# Altium PCB RigadoBreakout.PcbDoc
Units mil, origin at the board's own origin, x right, y up, seen from the top; angles counter-clockwise.
Board outline 900 x 1230 mil, 2 copper layers (Top Layer, Bottom Layer); 13 components, 27 nets, 98 pads, 12 vias.
Unrouted connection lines stored in the file: 14.
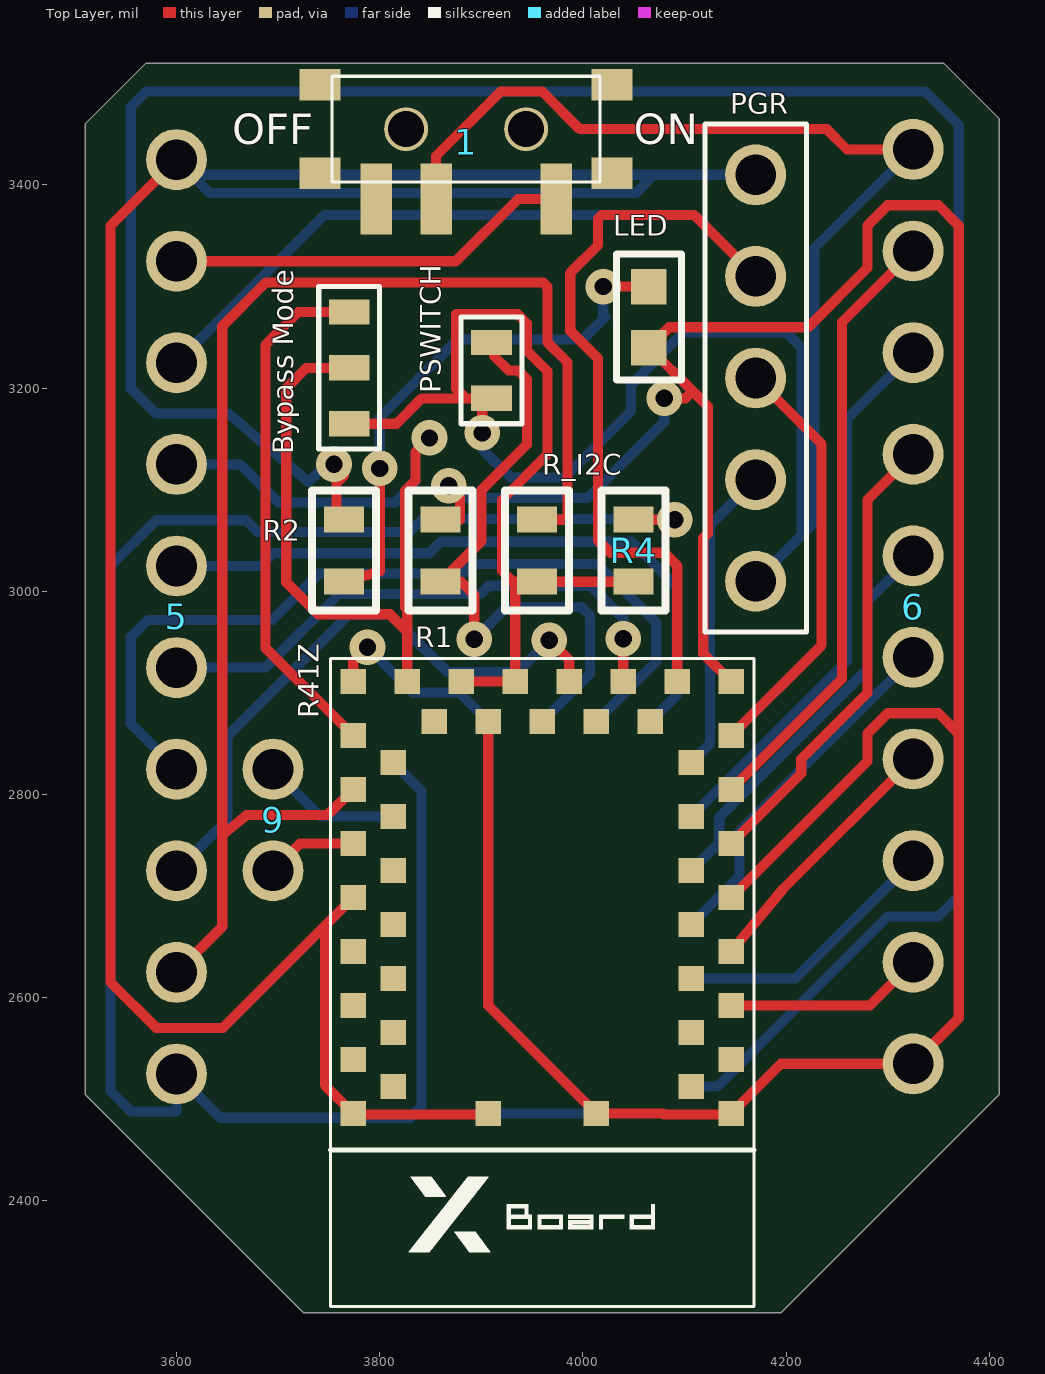
[diagram p0: Top Layer view]
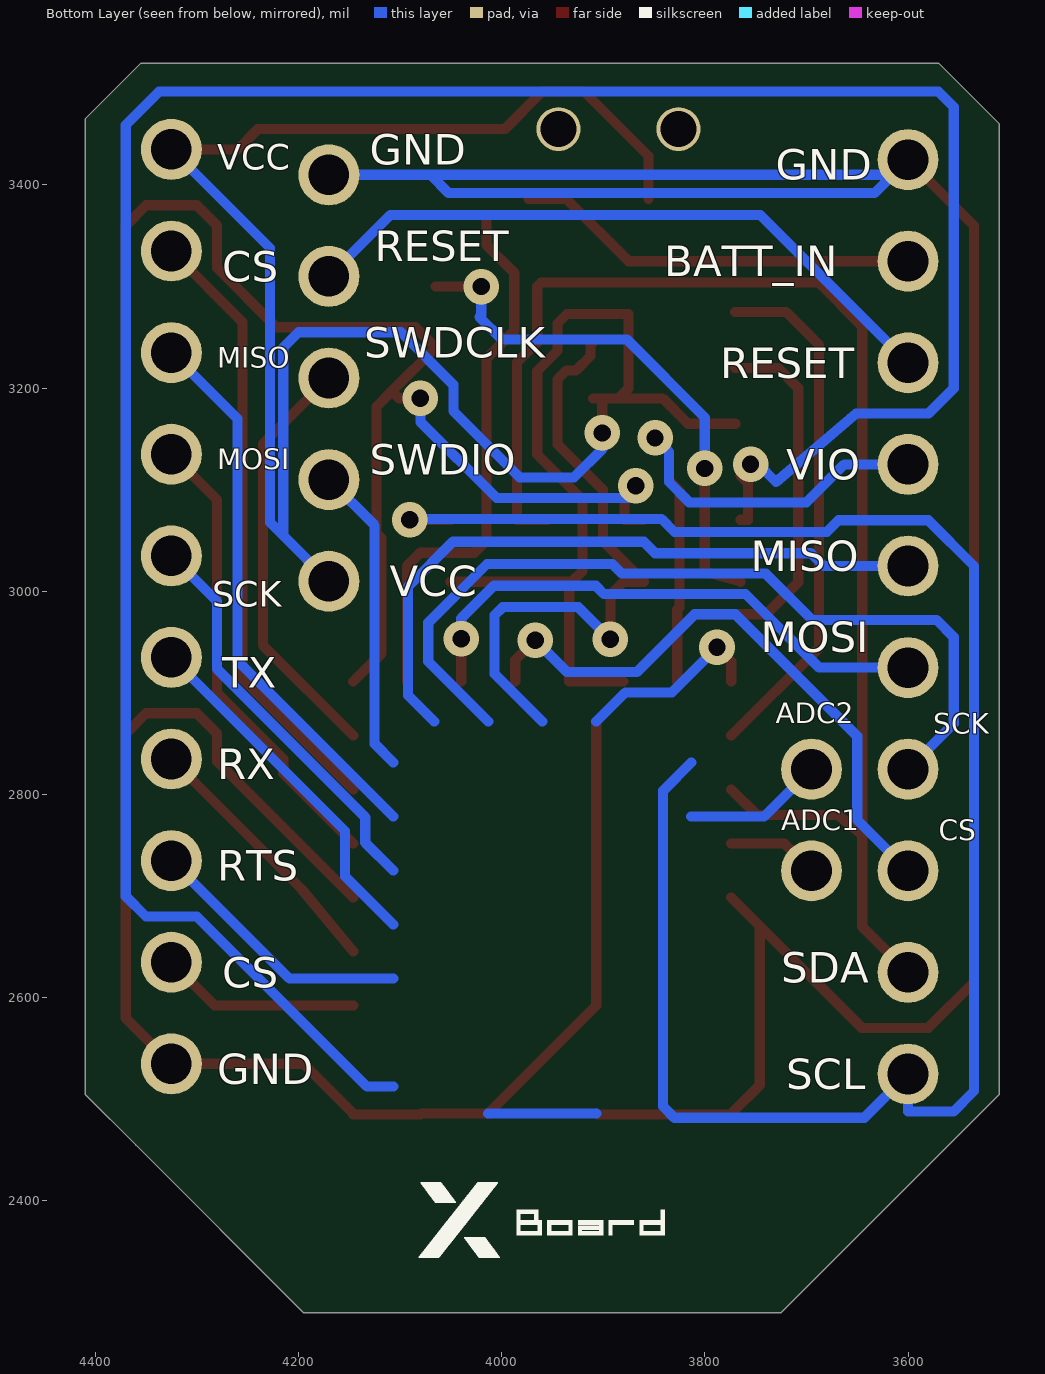
[diagram p1: Bottom Layer view, seen from below]

## Layer stack, top to bottom
Top Solder: solder mask 0.4, Solder Resist, Dk 3.5
Top Layer: signal copper 1.4
Dielectric 1: dielectric 12.6, FR-4, Dk 4.8
Bottom Layer: signal copper 1.4
Bottom Solder: solder mask 0.4, Solder Resist, Dk 3.5

## Board outline
3510,2505 3575,2440 3725,2290 4195,2290 4360,2455 4410,2505 4410,3465 4355,3520 3570,3520 3510,3460

## Design rules (kind name [scope] priority, off if disabled: settings)
Clearance [All] p1: gap=10
PolygonConnect [All] p1: connectstyle=Relief reliefconductorwidth=10 reliefentries=4 polygonreliefangle="90 Angle" airgapwidth=10
RoomDefinition RigadoBreakout [InComponentClass('RigadoBreakout')] p1: confinementstyle=ConfineIn formatcopy=TRUE lockcomponents=FALSE outline 0,0 2000,0 2000,1000 0,1000
RoutingVias [All] p1: holewidth=17 width=35 viastyle="Through Hole" minholewidth=15 minwidth=30 maxholewidth=20 maxwidth=40
SolderMaskExpansion [All] p1: expansion=4
UnpouredPolygon [All] p1: allowunpoured=FALSE
Width [All] p1: maxlimit=10 minlimit=10 preferedwidth=10
29 further rules are at their usual default settings.

## Classes and differential pairs
component class RigadoBreakout: 1 5 6 9 "Bypass Mode" PGR R1 R2 R4 R_I2C

## Components (designator, comment, footprint, x,y, rotation, side; value= is the part's Value field where it differs from the comment)
1 "Power Switch" "SMT_SWITCH - duplicate" 3885,3455 r180 top
5 "Pin Breakout" 10Pin_Breakout 3600,3425 r180 top
6 "Pin Breakout" 10Pin_Breakout 4325,3435 r180 top
9 "ADC Breakout" "ADC Breakout" 3695,2725 r0 top
"Bypass Mode" "Jumper Switch" JumpSwitch 3770,3275 r270 top
LED "LED" SMD0603 4065,3270 r270 top (schematic designator 2)
PGR "Programmer" Programmer 4170,3010 r0 top (schematic designator A)
PSWITCH "Jumper Switch2" JumpSwitch2 3910,3190 r90 top (schematic designator 8)
R1 "0603 Res" "0603/1608 SMD Resistor" 3860,3040 r90 top
R2 "0603 Res" "0603/1608 SMD Resistor" 3765,3040 r90 top
R4 "0603 Res" "0603/1608 SMD Resistor" 4050,3040 r90 top
R41Z "Rigado R41Z" RigadoR41Z 3960,2615 r90 top (schematic designator *)
R_I2C "0603 Res" "0603/1608 SMD Resistor" 3955,3040 r90 top (schematic designator R3)

## Footprints (in the part's own frame and the unit in brackets; to place one, negate y for a bottom-side part, rotate by r counter-clockwise, add the part's x,y. Pads: shape width x height; smd on the part's side, far side on the other; paste and mask are expansions set on the pad)
10Pin_Breakout [mil]
  round 60 hole 40: 1(0,0) 1(0,0) 2(0,100) 3(0,200) 4(0,300) 5(0,400) 6(0,500) 7(0,600) 8(0,700) 9(0,800) 10(0,900)
"0603/1608 SMD Resistor" [mm]
  rect 0.65x1 smd: 1(0.775,0) 2(-0.775,0)
  silkscreen extent -1.5,-0.8 1.5,0.8, body extent -0.8,-0.5 0.8,0.5, height 1.2
"ADC Breakout" [mil]
  round 60 hole 40: 1(0,0) 2(0,100)
JumpSwitch [mil]
  rect 25x40 smd: 1(0,0) 2(55,0) 3(110,0)
  silkscreen extent -25,-30 135,30
JumpSwitch2 [mil]
  rect 25x40 smd: 1(0,0) 2(55,0)
  silkscreen extent -25,-30 80,30
Programmer [mil]
  round 60 hole 40: 1(0,0) 2(0,100) 3(0,200) 4(0,300) 5(0,400)
  silkscreen extent -50,-50 50,450
RigadoR41Z [mm]
  rect 0.635x0.635 smd: 1(-3.275,-4.725) 3(-1.925,-4.725) 5(-0.575,-4.725) 7(0.775,-4.725) 9(2.125,-4.725) 11(3.475,-4.725) 13(4.825,-4.725) 15(6.175,-4.725) 16(7.525,-4.725) 17(7.525,-3.375) 19(7.525,-2.025) 21(7.525,-0.675) 23(7.525,0.675) 25(7.525,2.025) 27(7.525,3.375) 28(7.525,4.725) 29(6.175,4.725) 31(4.825,4.725) 33(3.475,4.725) 35(2.125,4.725) 37(0.775,4.725) 39(-0.575,4.725) 41(-1.925,4.725) 43(-3.275,4.725)
  rect 0.635x0.635 smd paste+0: 2(-2.6,-3.725) 4(-1.25,-3.725) 6(0.1,-3.725) 8(1.45,-3.725) 10(2.8,-3.725) 12(4.15,-3.725) 14(5.5,-3.725) 18(6.525,-2.7) 20(6.525,-1.35) 22(6.525,0) 24(6.525,1.35) 26(6.525,2.7) 30(5.5,3.725) 32(4.15,3.725) 34(2.8,3.725) 36(1.45,3.725) 38(0.1,3.725) 40(-1.25,3.725) 42(-2.6,3.725) 44(-3.275,1.35) 45(-3.275,-1.35)
  silkscreen extent -8.1,-5.3 8.1,5.3
SMD0603 [mil]
  rect 35x35 smd: 1(-30,0) 2(30,0)
  silkscreen extent -62,-32 62,32, body extent -31,-16 32,16, height 18
"SMT_SWITCH - duplicate" [mil]
  rect 31x70 smd: 0(-88.58,68.9) 1(29.53,68.9) 2(88.58,68.9)
  rect 40x31 smd: M(-143.7,-43.5) M(-143.7,43.5) M(143.7,-43.5) M(143.7,43.5)
  round 43.31 hole 35.43 unplated: M(-59.06,0) M(59.06,0)
  silkscreen extent -132,-52 132,52

## Via types
v1: diameter 35, hole 17, Top Layer to Bottom Layer, 12 vias

## Nets (pads, with @x,y where several pads share a name; then routed paths per layer and width w, separated by ;. In a path a pad name is that pad's centre, name@x,y a point inside that pad or via, vN(x,y) a via of type N, cw(c..) or ccw(c..) an arc to the next point about the centre after c; other vN are vias at no path point)
ADC1: 9.1 R41Z.33 | length 90.1
  Top Layer w10: 9.1 3721.81,2751.81 R41Z.33
ADC2: 9.2 R41Z.32 | length 137.7
  Bottom Layer w10: 9.2 3741.61,2778.39 3813.35,2778.39
BATT_IN: 1.0 5.2 | length 398.9
  Top Layer w10: 5.2 3875,3325 3936.1,3386.1 1.0
GND: 5.1 6.10 LED.2 PGR.5 R1.1 R41Z.1 R41Z.9 R41Z.16 R41Z.24 R41Z.28 R41Z.35 R41Z.43 R41Z.44 R41Z.45 | length 5876.7
  Top Layer w10: 5.1@3600,3425 3535,3360 3535,2615.37 3580,2570.37 3645.68,2570.37 3746,2670.69 ; R41Z.35 3746,2670.69 ; R41Z.28 3773.97,2930.97 v1(3788,2945) ; R1.1 3879,3070.51 3879,3093 v1(3868,3104) ; R41Z.44 3905.79,2485 3775.03,2485 R41Z.43 3746,2514.03 3746,2670.69 ; R41Z.24 3906.85,2592.36 R41Z.45 4079,2486.06 4080.06,2485 4146.02,2485 R41Z.1 4194.96,2535 6.10 4370,2580 4370,2860 ; v1(4080,3190) 4101,3190 4108,3197 ; R41Z.9 4280,2832.64 4280,2860 4300,2880 4350,2880 4370,2860 ; R41Z.16 4118.5,2938.78 4118.5,3052.54 4123.01,3057.05 4123.01,3181.99 4108,3197 ; 4108,3197 LED.2 4085,3260 4221.71,3260 4280,3318.29 4280,3360 4300,3380 4350,3380 4370,3360 4370,2860
  Bottom Layer w10: 5.1@3600,3425 5.1@3615,3410 ; v1(3788,2945) 3832.5,2900.5 3878.24,2900.5 3906.85,2871.89 ; v1(3868,3104) 3868,3092 4005,3092 4080,3167 v1(4080,3190) ; 3906.85,2486.06 4013.15,2486.06 ; PGR.5 4070,3410 ; 5.1@3615,3410 4070,3410 ; 5.1@3615,3410 3633,3392 4052,3392 4070,3410
I2C_SCL: 5.10 R4.1 R41Z.30 | length 1865.5
  Top Layer w10: R4.1 v1(4090.51,3070.51)
  Bottom Layer w10: 3813.35,2831.54 3841,2803.89 3841,2493 3830,2482 3643,2482 5.10 3600,2487.96 3555.32,2487.96 3535,2508.29 3535,3025 3580,3070 3668.4,3070 3679.9,3058.5 3829.77,3058.5 3842.5,3071.23 4089.79,3071.23 v1(4090.51,3070.51)
I2C_SDA: 5.9 R41Z.31 R_I2C.1 | length 1408.4
  Top Layer w10: 5.9 3645,2670 3645,2760 ; R41Z.31 3749.01,2780 3669,2780 3645,2760 ; R_I2C.1 3985,3070.51 3985,3225.28 3965,3245.28 3965,3300 3961,3304 3688,3304 3645,3261 3645,2760
LED: R2.1 R41Z.2 | length 2523.3
  Top Layer w10: v1(3755,3125) 3755,3124 3765,3114 3757.5,3106.5 3757.5,3070.51 R2.1
  Bottom Layer w10: v1(3755,3125) 3747.38,3125 3730,3107.62 3651,3175 3580,3175 3555,3200 3555,3476.71 3570.29,3492 4337.07,3492 4370,3459.07 4370,2700 4350,2680 4300,2680 4132.64,2512.64 4106.65,2512.64
Net2_1: LED.1 R2.2 | length 526.8
  Top Layer w10: R2.2 3800,3019.49 v1(3800,3121) ; v1(4020,3300) LED.1
  Bottom Layer w10: v1(3800,3121) 3800,3171.2 3876.86,3248.06 4000,3248.06 4021.94,3270 4020,3271.94 v1(4020,3300)
Net*_5: 6.9 R41Z.5 | length 196.6
  Top Layer w10: R41Z.5 4282.36,2592.36 6.9
Net*_6: 6.8 R41Z.6 | length 266.4
  Bottom Layer w10: 4106.65,2618.94 4208.94,2618.94 6.8
Net*_7: 6.7 R41Z.7 | length 260.9
  Top Layer w10: R41Z.7 4197,2707 6.7
Net*_8: 6.6 R41Z.8 | length 353.4
  Bottom Layer w10: 4106.65,2672.09 4154.15,2719.59 4154.15,2764.15 6.6
Net*_10: 6.5 R41Z.10 | length 400.2
  Bottom Layer w10: 4106.65,2725.24 4134.15,2752.74 4134.15,2777.6 4280,2923.45 4280,2990 6.5
Net*_11: 6.4 R41Z.11 | length 457.3
  Top Layer w10: R41Z.11 4214.96,2820.75 4214.96,2834.96 4280,2900 4280,3090 6.4
Net*_12: 6.3 R41Z.12 | length 547.1
  Bottom Layer w10: 4106.65,2778.39 4260,2931.74 4260,3170 6.3
Net*_13: 6.2 R41Z.13 | length 604.2
  Top Layer w10: R41Z.13 4255,2913.94 4255,3265 6.2
Net*_18: 5.5 R41Z.18 | length 664
  Bottom Layer w10: 5.5 3683,3025 3695.5,3037.5 3848.77,3037.5 3860.19,3048.92 4047.98,3048.92 4092.22,3004.68 4092.22,2897.81 4066.3,2871.89
Net*_19: 5.6 R41Z.19 | length 548.5
  Top Layer w10: R41Z.19 v1(4039.72,2953.28)
  Bottom Layer w10: 5.6 3687.5,2925 3760,2997.5 3899.37,2997.5 3907.37,3005.5 4007.64,3005.5 4039.72,2973.42 v1(4039.72,2953.28)
Net*_20: 5.7 R41Z.20 | length 841.4
  Bottom Layer w10: 5.7 3555,2870 3555,2955 3572,2972 3694.5,2972 3740,3017.5 3881.5,3017.5 3891,3027 4014.43,3027 4072.22,2969.21 4072.22,2930.96 4013.15,2871.89
Net*_21: 5.8 R41Z.21 | length 605.4
  Top Layer w10: v1(3967,2952) 3986.57,2932.43 R41Z.21
  Bottom Layer w10: 5.8 3650,2775 3650,2857.5 3770,2977.5 3810,2977.5 3867,2920.5 3935.5,2920.5 v1(3967,2952)
Net*_22: PSWITCH.2 R1.2 R41Z.22 | length 627.1
  Top Layer w10: v1(3893,2953) 3893,2996.49 3880,3009.49 R1.2 3900.31,3049.8 3900.31,3100 3945,3144.69 3945,3208.71 3936.21,3217.5 3926.69,3217.5 3912.5,3231.69 3912.5,3242.5 PSWITCH.2
  Bottom Layer w10: v1(3893,2953) 3924.5,2984.5 3999,2984.5 4007,2976.5 4007,2918.89 3960,2871.89
Net*_29: "Bypass Mode.1" R41Z.29 | length 516.2
  Top Layer w10: 3770,3275 3720,3275 3687.5,3242.5 3687.5,2944.58 R41Z.29
RESET: 5.3 PGR.4 R41Z.17 | length 1378.7
  Top Layer w10: R41Z.17 4092.87,3025.13 4080,3038 4027,3038 4015,3050 4015,3229.04 3987.5,3256.54 3987.5,3313.46 4015,3340.96 4015,3367 4018.5,3370.5 4109.5,3370.5 PGR.4
  Bottom Layer w10: 5.3 3745.5,3370.5 4109.5,3370.5 PGR.4
SWDCLK: PGR.3 R41Z.15 | length 415.7
  Top Layer w10: R41Z.15 4235,2947.09 4235,3145 PGR.3
SWDIO: PGR.2 R41Z.14 | length 304.7
  Bottom Layer w10: 4106.65,2831.54 4125,2849.89 4125,3065 PGR.2
VCC: 1.1 6.1 "Bypass Mode.3" PGR.1 PSWITCH.1 R4.2 R41Z.23 R41Z.25 R_I2C.2 | length 2559.4
  Top Layer w10: 3770,3165 3816.5,3165 3841.5,3190 3885,3190 ; 1.1 3855.47,3428.47 3919,3492 3960,3492 3997,3455 4240,3455 4260,3435 6.1@4325,3435 ; R41Z.25 R41Z.23 3933.42,3009.49 ; v1(3901,3156) PSWITCH.1@3901,3190 ; PSWITCH.1 PSWITCH.1@3901,3190 ; R4.2 R_I2C.2 3933.42,3009.49 ; 3885,3190 PSWITCH.1@3901,3190 ; 3885,3190 3875,3200 3875,3273 3935.71,3273 3945,3263.71 3945,3237 3965,3217 3965,3134.69 3920.31,3090 3920.31,3020 3930.83,3009.49 3933.42,3009.49
  Bottom Layer w10: v1(3901,3156) 3901,3140 3928.87,3112.13 3982.13,3112.13 4047.5,3177.5 4047.5,3203.46 4099.04,3255 4200,3255 4215,3240 4215,3055 ; PGR.1 4215,3055 ; 6.1@4325,3435 4228,3338 4228,3068 4215,3055
VIO: 5.4 "Bypass Mode.2" R41Z.27 | length 959.2
  Top Layer w10: 3770,3220 3728,3220 3708,3200 3708,3009 3739.5,2977.5 3810,2977.5 3827.12,2960.38 ; R41Z.27 3827.12,2960.38 ; v1(3849,3151) 3835.31,3137.31 3835.31,3109.31 3825,3099 3825,2984.12 3827.12,2982 3827.12,2960.38
  Bottom Layer w10: 5.4 3662.62,3125 3700,3087.62 3815.31,3087.62 3835.31,3107.62 3835.31,3137.31 v1(3849,3151)
pads on no net: 1.2 1.M R41Z.3 R41Z.4 R41Z.26 R41Z.34 R41Z.36 R41Z.37 R41Z.38 R41Z.39 R41Z.40 R41Z.41 R41Z.42

## Silkscreen, mask and mechanical layers (free items; w line width, h text height)
Top Overlay:
  drawing of 1559 lines, arcs and shapes, not listed
  text "OFF" at 3655,3440 h30
  text "ON" at 4050,3440 h30
Bottom Overlay:
  drawing of 1559 lines, arcs and shapes, not listed
  text "GND" at 4130,3420 h30
  text "VCC" at 4280,3415 h25
  text "GND" at 3730,3405 h30
  text "RESET" at 4125,3325 h30
  text "BATT_IN" at 3840,3310 h30
  text "CS" at 4275,3305 h30
  text "SWDCLK" at 4135,3230 h30
  text "MISO" at 4280,3220 h20
  text "RESET" at 3785,3210 h30
  text "MOSI" at 4280,3120 h20
  text "SWDIO" at 4130,3115 h30
  text "VIO" at 3720,3110 h30
  text "MISO" at 3755,3020 h30
  text "VCC" at 4110,2995 h30
  text "SCK" at 4285,2985 h25
  text "MOSI" at 3745,2940 h30
  text "TX" at 4275,2905 h30
  text "ADC2" at 3730,2870 h20
  text "SCK" at 3575,2860 h20
  text "RX" at 4280,2815 h30
  text "ADC1" at 3725,2765 h20
  text "CS" at 3570,2755 h20
  text "RTS" at 4280,2715 h30
  text "SDA" at 3725,2615 h30
  text "CS" at 4275,2610 h30
  text "GND" at 4280,2515 h30
  text "SCL" at 3720,2510 h30
Mechanical 1:
  the board outline again, w5